# Altium PCB PCB.PcbDoc
Units mm, origin at the board's own origin, x right, y up, seen from the top; angles counter-clockwise.
Board outline 32.39 x 38.48 mm, 2 copper layers (Top Layer, Bottom Layer); 29 components, 24 nets, 116 pads, 23 vias.
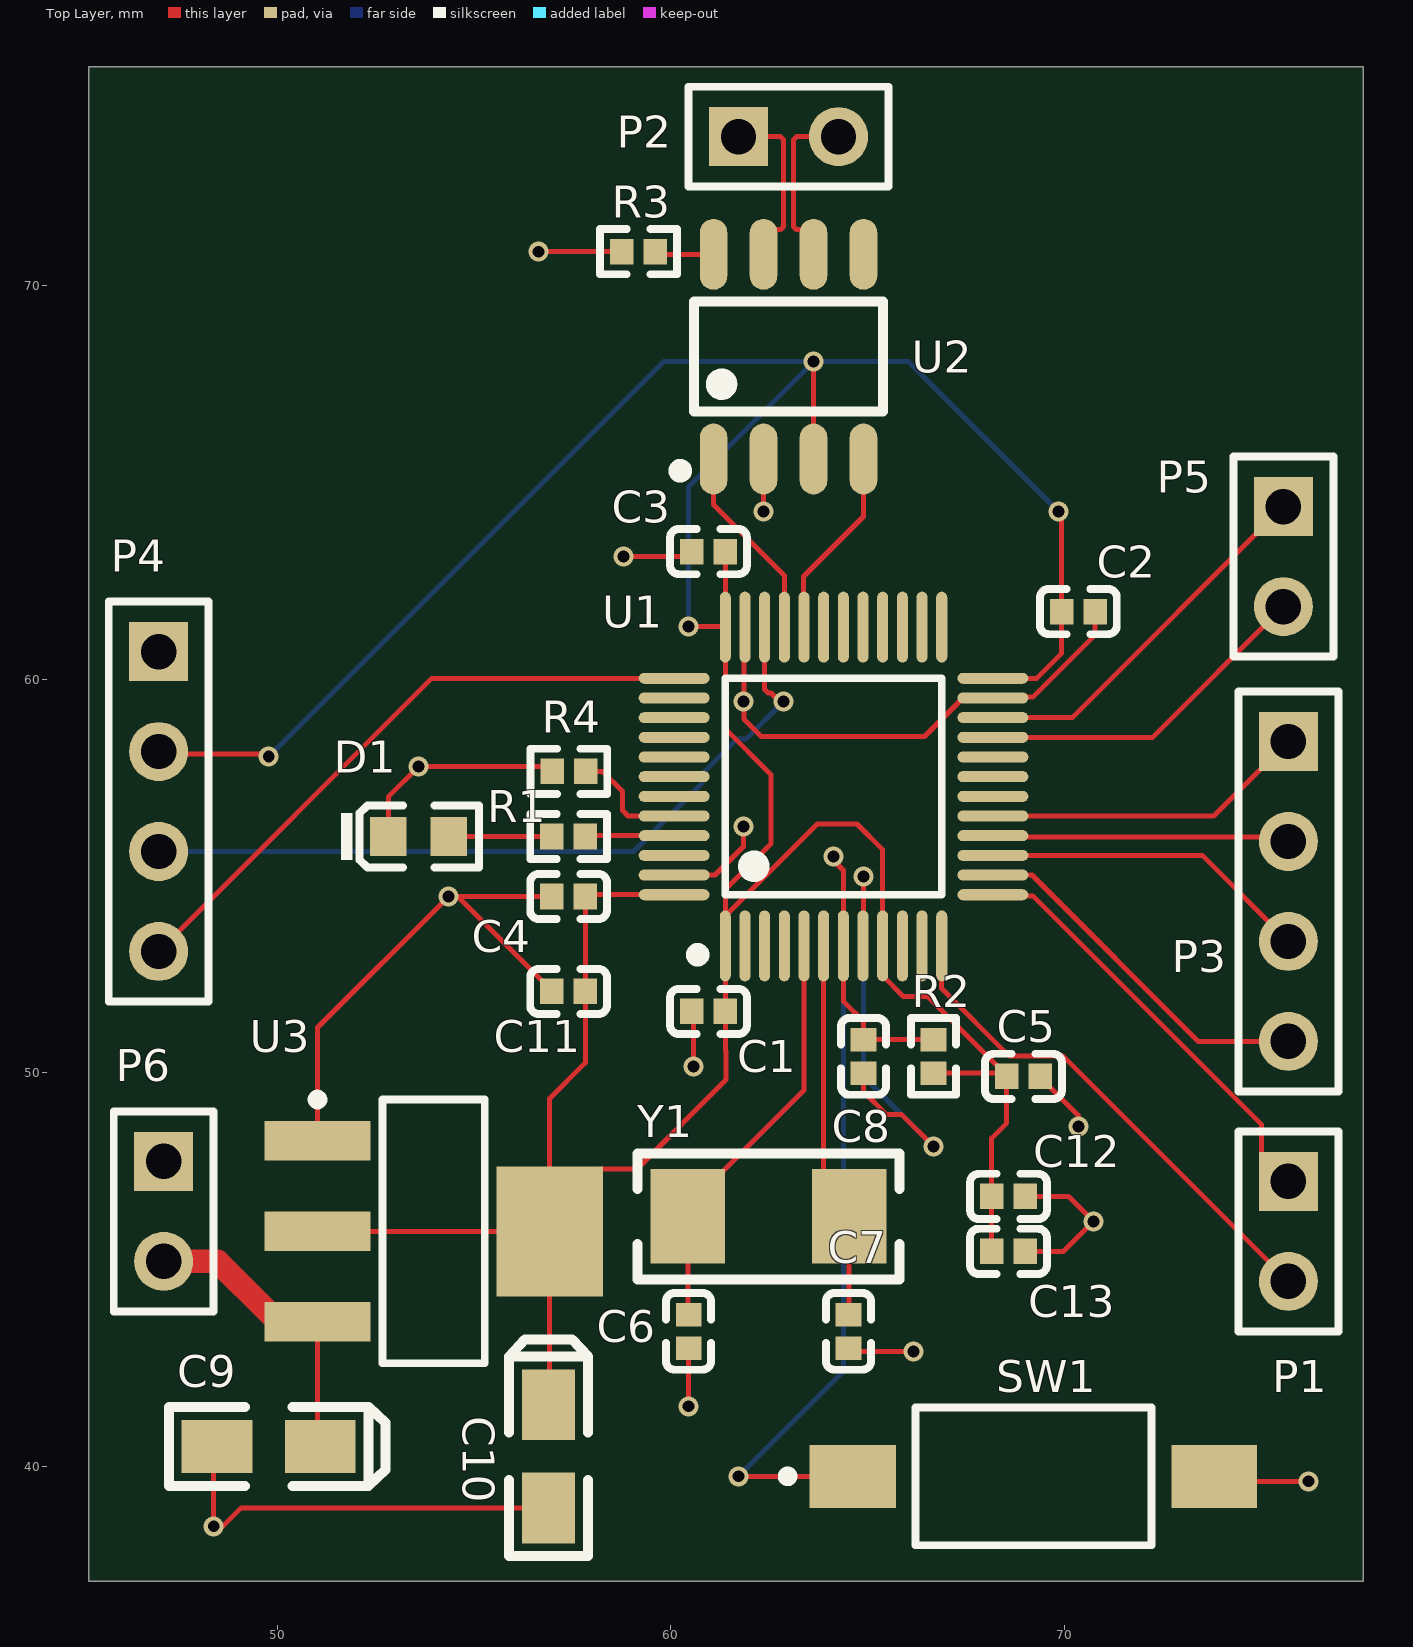
[diagram p0: Top Layer view]
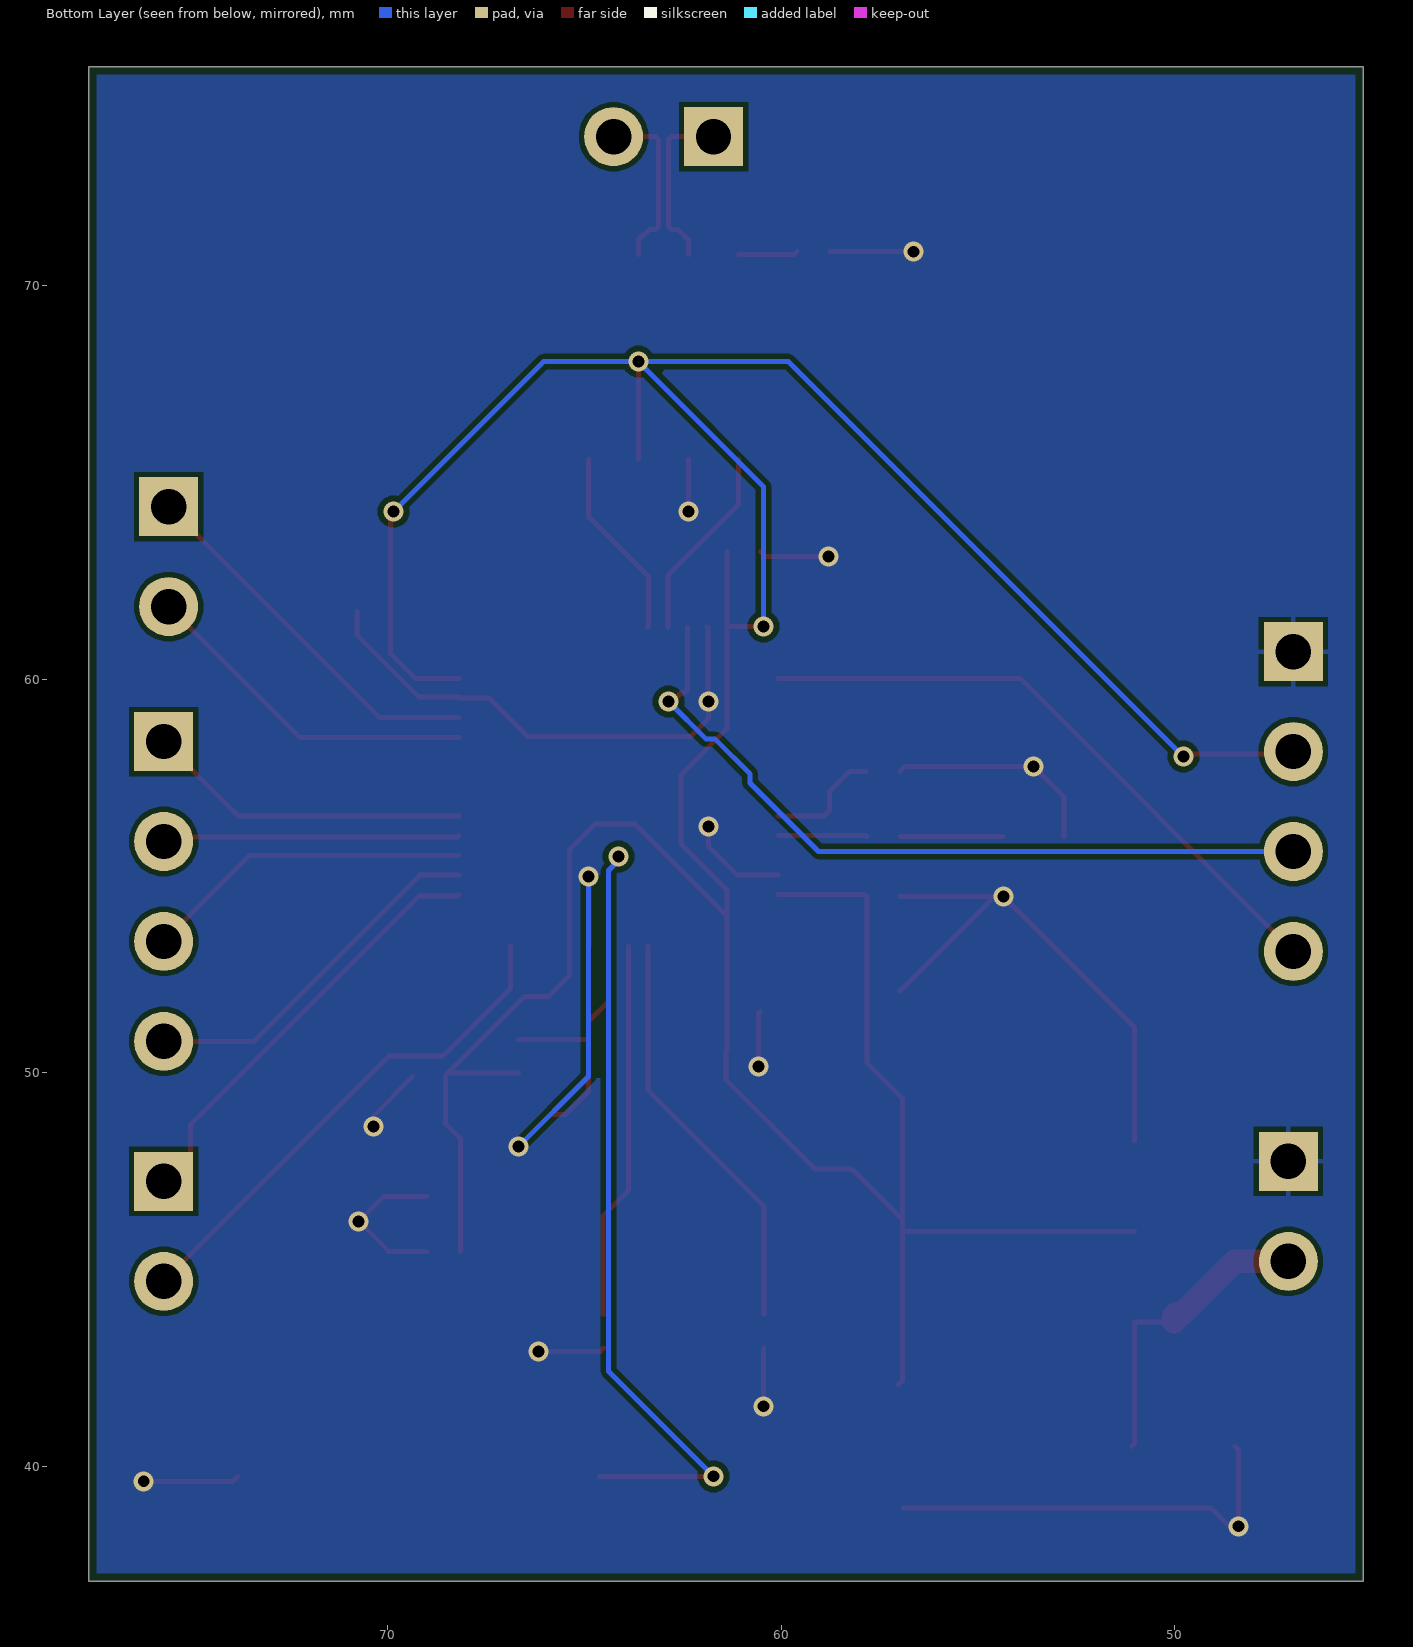
[diagram p1: Bottom Layer view, seen from below]
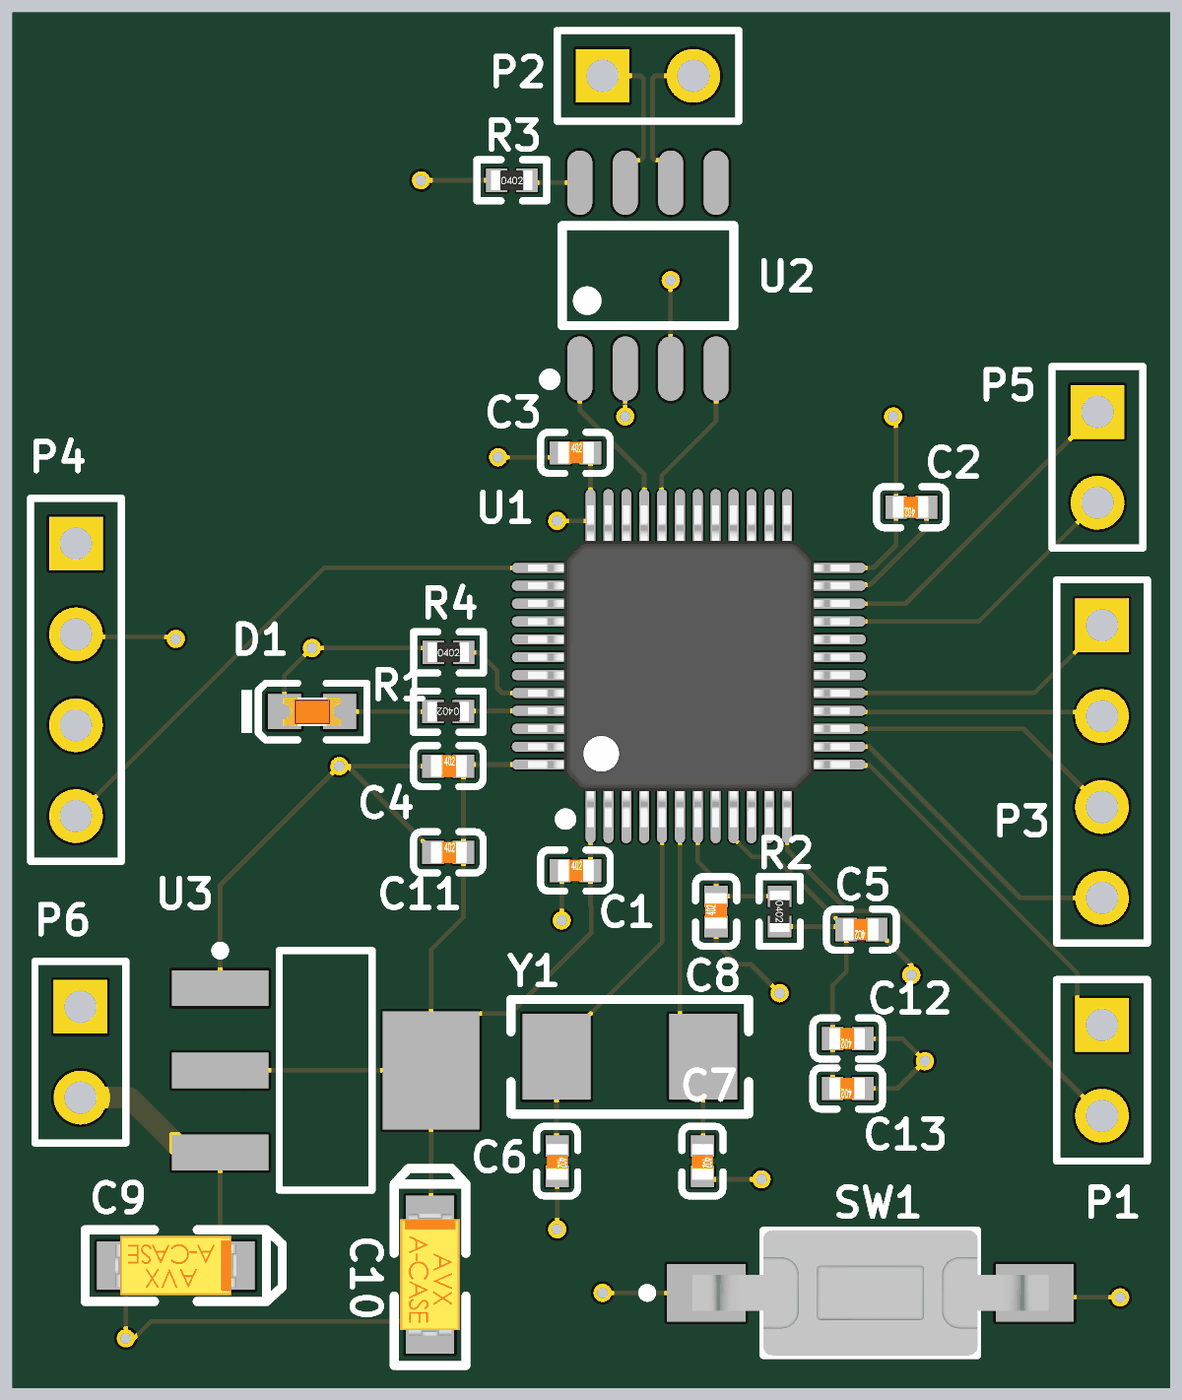
[diagram p2: 3D render of the assembled board from above, using the file's embedded part models]

## Layer stack, top to bottom
Top Solder: solder mask 0.0102, Solder Resist, Dk 3.5
Top Layer: signal copper 0.0356
Dielectric 1: dielectric 0.32, FR-4, Dk 4.8
Bottom Layer: signal copper 0.0356
Bottom Solder: solder mask 0.0102, Solder Resist, Dk 3.5

## Board outline
45.212,37.084 77.597,37.084 77.597,75.565 45.212,75.565

## Design rules (kind name [scope] priority, off if disabled: settings)
BoardOutlineClearance [All] p1: gap=0.2 ignorepadtopadclearanceinfootprint=FALSE
Clearance [All] p1: gap=0.127 ignorepadtopadclearanceinfootprint=FALSE except(0.25: Arc-Hole Track-Hole SMDPad-Hole THPad-Hole Via-Hole Fill-Hole Poly-Hole Region-Hole Text-Hole)
ComponentClearance [All] p1: gap=0.127 collisioncheckmode=3 verticalgap=0.127 showdistances=TRUE
DiffPairsRouting [All] p1: maxlimit=0.254 minlimit=0.127 mostfreqgap=0.127 toplayer_minwidth=0.127 toplayer_maxwidth=25.4 toplayer_prefwidth=0.127 bottomlayer_minwidth=0.127 bottomlayer_maxwidth=25.4 bottomlayer_prefwidth=0.127 maxuncoupledlength=12.7
Height [All] p1: minheight=0 maxheight=1816.048 prefheight=12.7
HoleSize [All] p1: absolutevalues=TRUE maxlimit=6.3 minlimit=0.3 maxpercent=80.000 minpercent=20.000
HoleToHoleClearance [All] p1: gap=0.25 allowstackedmicrovias=FALSE
MinimumAnnularRing [All] p1: minimumring=0.076
MinimumSolderMaskSliver [All] p1: minsoldermaskwidth=0
PlaneClearance [All] p1: clearance=0.127
PlaneConnect PlaneConnectPowerPads [InPadClass('PowerPads')] p1: planeconnectstyle=Direct reliefexpansion=0.508 reliefentries=4 reliefconductorwidth=0.254 reliefairgap=0.254
PlaneConnect [All] p2: pad.planeconnectstyle=Relief pad.reliefexpansion=0.3 pad.reliefentries=4 pad.reliefconductorwidth=0.127 pad.reliefairgap=0.127 via.planeconnectstyle=Direct via.reliefexpansion=0.3 via.reliefentries=4 via.reliefconductorwidth=0.127 via.reliefairgap=0.127
PolygonConnect PolygonConnectPowerPads [All vs (InPadClass('PowerPads'))] p1: connectstyle=Direct reliefconductorwidth=0.254 reliefentries=4 polygonreliefangle="90 Angle" airgapwidth=0.254
PolygonConnect [All] p2: thpad.connectstyle=Relief thpad.reliefconductorwidth=0.127 thpad.reliefentries=4 thpad.polygonreliefangle="90 Angle" thpad.airgapwidth=0.127 smdpad.connectstyle=Relief smdpad.reliefconductorwidth=0.127 smdpad.reliefentries=4 smdpad.polygonreliefangle="90 Angle" smdpad.airgapwidth=0.127 via.connectstyle=Direct via.reliefconductorwidth=0.127 via.reliefentries=4 via.polygonreliefangle="90 Angle" via.airgapwidth=0.127
RoutingVias [All] p1: holewidth=0.3 width=0.6 viastyle="Through Hole" minholewidth=0.3 minwidth=0.6 maxholewidth=0.6 maxwidth=6.6
SilkToSilkClearance [All] p1: silktosilkclearance=0
SilkToSolderMaskClearance [IsPad] p1: minsilkscreentomaskgap=0.127 clearancetoexposedcopper=TRUE
SolderMaskExpansion [All] p1: expansion=0.075 istentingtop=FALSE
Width [All] p1: maxlimit=25.4 minlimit=0.127 preferedwidth=0.127 minimp=50.000000 maximp=50.000000 favimp=50.000000
20 further rules are at their usual default settings.

## Classes and differential pairs
component class MCU: C1 C2 C3 C4 C5 C6 C7 C8 C9 C10 C11 C12 C13 D1 R1 R2 R4 SW1 U1 U3 Y1
component class Connectors: P1 P2 P3 P4 P5 P6 R3 U2
differential pair CAN: +CAN_P -CAN_N

## Components (designator, comment, footprint, x,y, rotation, side; value= is the part's Value field where it differs from the comment)
C1 "100nF" 0402_C 60.96,51.562 r0 top
C2 "100nF" 0402_C 70.358,61.722 r180 top
C3 "100nF" 0402_C 60.96,63.246 r0 top
C4 "100nF" 0402_C 57.404,54.483 r0 top
C5 "100nF" 0402_C 68.961,49.911 r180 top
C6 "30pF" 0402_C 60.452,43.434 r270 top
C7 "30pF" 0402_C 64.516,43.434 r270 top
C8 "100nF" 0402_C 64.897,50.419 r90 top
C9 "10uF" CASE-A_3216 49.784,40.513 r0 top
C10 "10uF" CASE-A_3216 56.896,40.259 r90 top
C11 "4.7uF" 0402_C 57.404,52.07 r0 top
C12 "10nF" 0402_C 68.58,46.863 r180 top
C13 "1.0uF" 0402_C 68.58,45.466 r180 top
D1 "0603 Red" 0603_LED_S1 53.594,56.007 r0 top
P1 "Header 2" HDR1X2 75.692,47.244 r270 top
P2 "Header 2" HDR1X2 61.722,73.787 r0 top
P3 "Header 4" HDR1X4 75.692,58.42 r270 top
P4 "Header 4" HDR1X4 46.99,60.706 r270 top
P5 "Header 2" HDR1X2 75.565,64.389 r270 top
P6 "Header 2" HDR1X2 47.117,47.752 r270 top
R1 "200Ω ±1%" 0402_R 57.404,56.007 r180 top
R2 "100KΩ ±1%" 0402_R 66.675,50.419 r270 top
R3 "10KΩ ±1%" 0402_R 59.182,70.866 r0 top
R4 "10KΩ ±1%" 0402_R 57.412,57.663 r0 top
SW1 "FSMSM" TECO-FSMSM-2_V 69.215,39.751 r0 top
U1 "STM32F103C8T6" LQFP-48_7x7x05P 64.135,57.277 r0 top
U2 "CAN/SN65HVD230DR" SOIC-8_150mil 62.992,68.199 r0 top
U3 "LM1117IMPX-3.3/NOPB" MP04A_M 53.975,45.974 r0 top
Y1 "8MHz ±20ppm 20pF" SMD-5032_2P 62.484,46.355 r180 top

## Footprints (in the part's own frame and the unit in brackets; to place one, negate y for a bottom-side part, rotate by r counter-clockwise, add the part's x,y. Pads: shape width x height; smd on the part's side, far side on the other; paste and mask are expansions set on the pad)
0402_C [mm]
  rect 0.6x0.65 smd mask+0.051: 1(-0.425,0) 2(0.425,0)
  silkscreen extent -0.97,-0.58 0.97,0.58, body extent -0.48,-0.3 0.52,0.3, height 0.2
0402_R [mm]
  rect 0.6x0.65 smd mask+0.051: 1(-0.425,0) 2(0.425,0)
  silkscreen extent -0.97,-0.58 0.97,0.58, body extent -0.57,-0.27 0.58,0.28, height 0.41
0603_LED_S1 [mm]
  rect 0.93x0.98 smd: A(0.77,0) K(-0.77,0)
  silkscreen extent -1.97,-0.79 1.54,0.79, body extent -0.8,-0.4 0.8,0.4, height 0.6
CASE-A_3216 [mm]
  rect 1.8x1.35 smd: 1(1.31,0) 2(-1.31,0)
  silkscreen extent -2.54,-1 2.97,1, body extent -1.7,-0.84 1.7,0.84, height 1.71
HDR1X2 [mm] "Connector; Header; 2 Position"
  rect 1.5x1.5 hole 0.9: 1(0,0)
  round 1.5 hole 0.9: 2(2.54,0)
  silkscreen extent -1.27,-1.27 3.81,1.27
HDR1X4 [mm] "Connector; Header; 4 Position"
  rect 1.5x1.5 hole 0.9: 1(0,0)
  round 1.5 hole 0.9: 2(2.54,0) 3(5.08,0) 4(7.62,0)
  silkscreen extent -1.27,-1.27 8.89,1.27
LQFP-48_7x7x05P [mm]
  oval 0.28x1.8 smd mask+0.051: 1(-2.75,-4.05) 2(-2.25,-4.05) 3(-1.75,-4.05) 4(-1.25,-4.05) 5(-0.75,-4.05) 6(-0.25,-4.05) 7(0.25,-4.05) 8(0.75,-4.05) 9(1.25,-4.05) 10(1.75,-4.05) 11(2.25,-4.05) 12(2.75,-4.05) 25(2.75,4.05) 26(2.25,4.05) 27(1.75,4.05) 28(1.25,4.05) 29(0.75,4.05) 30(0.25,4.05) 31(-0.25,4.05) 32(-0.75,4.05) 33(-1.25,4.05) 34(-1.75,4.05) 35(-2.25,4.05) 36(-2.75,4.05)
  oval 1.8x0.28 smd mask+0.051: 13(4.05,-2.75) 14(4.05,-2.25) 15(4.05,-1.75) 16(4.05,-1.25) 17(4.05,-0.75) 18(4.05,-0.25) 19(4.05,0.25) 20(4.05,0.75) 21(4.05,1.25) 22(4.05,1.75) 23(4.05,2.25) 24(4.05,2.75) 37(-4.05,2.75) 38(-4.05,2.25) 39(-4.05,1.75) 40(-4.05,1.25) 41(-4.05,0.75) 42(-4.05,0.25) 43(-4.05,-0.25) 44(-4.05,-0.75) 45(-4.05,-1.25) 46(-4.05,-1.75) 47(-4.05,-2.25) 48(-4.05,-2.75)
  silkscreen extent -3.6,-4.42 2.75,2.75, body extent -4.5,-4.5 4.5,4.5, height 1.6
MP04A_M [mm] "SOT223, 4-Leads, Body 6.5x3.5mm, Pitch 2.3mm, Lead Span 7mm, IPC Low Density"
  rect 2.7x1 smd: 1(-2.95,2.3) 2(-2.95,0) 3(-2.95,-2.3)
  rect 2.7x3.3 smd: 4(2.95,0)
  silkscreen extent -3.07,-3.35 1.3,3.47, body extent -1.86,-3.35 1.86,3.35, height 1.8
SMD-5032_2P [mm]
  rect 1.9x2.4 smd: 1(-2.05,0) 2(2.05,0)
  silkscreen extent -3.32,-1.6 3.32,1.6
SOIC-8_150mil [mm]
  oval 0.7x1.8 smd: 1(-1.905,-2.6) 2(-0.635,-2.6) 3(0.635,-2.6) 4(1.905,-2.6) 5(1.905,2.6) 6(0.635,2.6) 7(-0.635,2.6) 8(-1.905,2.6)
  silkscreen extent -2.9,-3.05 2.4,1.4
TECO-FSMSM-2_V [mm] "SMD, 2-Leads, Body 6x3.5mm, Pitch 9.19mm"
  rect 2.2x1.6 smd: 1(-4.595,0)
  rect 2.18x1.6 smd: 2(4.595,0)
  silkscreen extent -6.37,-1.75 3,1.75, body extent -4.98,-1.75 4.98,1.75, height 4.4

## Part data
C1 C2 C3 C4 C5 C8: library part "0402 100nF (104) 10% 16V", "Chip capacitors", Manufacturer="Samsung Electro-Mechanics", Package=0402, PartNumber=CL05B104KO5NNNC, SuppliersPartNumber=C1525, Tolerance=10%, Voltage=16V, Capacitance=100nF, ComponentLink1Description="Supplier link", ComponentLink1URL=http://www.szlcsc.com/product/details_1877.html, Supplier=LC
C6 C7: library part "0402 30pF (300) 5% 50V", "Chip capacitors", Manufacturer="Guangdong Fenghua Advanced Tech", Package=0402, PartNumber=0402CG300J500NT, SuppliersPartNumber=C1570, Tolerance=5%, Voltage=50V, Capacitance=30pF, ComponentLink1Description="Supplier link", ComponentLink1URL=http://www.szlcsc.com/product/details_1922.html, Supplier=LC
C9 C10: library part "3216 10uF (106) 10% 16V", "Tantalum capacitor", Manufacturer=AVX, Package=3216, PartNumber=TAJA106K016RNJ, SuppliersPartNumber=C7171, Tolerance=10%, Voltage=16V, Capacitance=10uF, ComponentLink1Description="Supplier link", ComponentLink1URL=http://www.szlcsc.com/product/details_7643.html, Supplier=LC
C11: library part "0402 4.7uF (475) 20% 10V", "Chip capacitor", Manufacturer="Samsung Electro-Mechanics", Package=0402, PartNumber=CL05A475MP5NRNC, SuppliersPartNumber=C23733, Tolerance=20%, Voltage=10V, Capacitance=4.7uF, ComponentLink1Description="Supplier link", ComponentLink1URL=http://www.szlcsc.com/product/details_24469.html, Supplier=LC
C12: library part "0402 10nF (103) 10% 50V", "Chip capacitors", Manufacturer="Samsung Electro-Mechanics", Package=0402, PartNumber=CL05B103KB5NNNC, SuppliersPartNumber=C15195, Tolerance=10%, Voltage=50V, Capacitance=10nF, ComponentLink1Description="Supplier link", ComponentLink1URL=http://www.szlcsc.com/product/details_15869.html, Supplier=LC
C13: library part "0402 1.0uF (105) 10% 25V", "Chip capacitor", Capacitance=1uF, Manufacturer="Samsung Electro-Mechanics", Package=0402, PartNumber=CL05A105KA5NQNC, SuppliersPartNumber=C52923, Tolerance=10%, Voltage=25V, ComponentLink1Description="Supplier link", ComponentLink1URL=http://www.szlcsc.com/product/details_53938.html, Supplier=LC
D1: library part "0603 LED Red", "LED", Color=Red, Package=0603, SuppliersPartNumber=C2286, ComponentLink1Description=供应商链接, ComponentLink1URL=http://www.szlcsc.com/product/details_2659.html, Supplier=LC
P1 P2 P5 P6: "Header, 2-Pin", LatestRevisionDate=17-Jul-2002, LatestRevisionNote="Re-released for DXP Platform.", Publisher="Altium Limited"
P3 P4: "Header, 4-Pin", LatestRevisionDate=17-Jul-2002, LatestRevisionNote="Re-released for DXP Platform.", Publisher="Altium Limited"
R1: library part "0402 200R (2000) 1%", "Chip resistor", Manufacturer="Uniroyal Elec", Package=0402, PartNumber=0402WGF2000TCE, Power=1/16W, Resistance=200Ω, SuppliersPartNumber=C25087, Tolerance=1%, ComponentLink1Description="Supplier link", ComponentLink1URL=http://www.szlcsc.com/product/details_25830.html, Supplier=LC
R2: library part "0402 100K (1003) 1%", "Chip resistor", Manufacturer="Uniroyal Elec", Package=0402, PartNumber=0402WGF1003TCE, Power=1/16W, Resistance=100KΩ, SuppliersPartNumber=C25741, Tolerance=1%, ComponentLink1Description="Supplier link", ComponentLink1URL=http://www.szlcsc.com/product/details_26484.html, Supplier=LC
R3 R4: library part "0402 10K (1002) 1%", "Chip resistor", Manufacturer="Uniroyal Elec", Package=0402, PartNumber=0402WGF1002TCE, Power=1/16W, Resistance=10KΩ, SuppliersPartNumber=C25744, Tolerance=1%, ComponentLink1Description="Supplier link", ComponentLink1URL=http://www.szlcsc.com/product/details_26487.html, Supplier=LC
SW1: library part CMP-2000-07511-1, "FSMSM Push Button Switch, 50 mA, -35 to 85 degC, 2-Pin SMD, RoHS, Bulk", Case\/Package=SMD/SMT, Contact Current Rating=50mA, Contact Resistance=100mOhm, Manufacturer="TE Connectivity", Max Operating Temperature=85degC, Max Voltage Rating (DC)=12V, Min Operating Temperature=-35degC, Operating Force=180gf, Package Description="2-Pin Surface Mount Device, Body 6 x 3.5 mm, Pitch 9.19 mm", Package Quantity=1000, Voltage Rating (DC)=24V, Actuator Length=1.07mm, Actuator Material=Polyamide, Contact Material=Brass, Contact Plating=Silver, Current Rating=50mA, Datasheet URL=http://www.te.com/commerce/DocumentDelivery/DDEController?Action=showdoc&DocId=Customer+Drawing%7F1437566-3%7FC2%7Fpdf%7FEnglish%7FENG_CD_1437566-3_C2_1437566_3_1_c.dwg.pdf%7F1437566-3, Datasheet Version="Rev. C2, 08/2014", Electrical Life=20000Cycles, ELV=Compliant, Illumination Type=Illuminated, Lead Free=LeadFree, Manufacturer URL=http://www.te.com/, Mechanical Life=20000Cycles, Mount=SurfaceMount, Mounting Technology=SurfaceMount, Orientation=Straight, Package Reference=FSMSM, Packaging=LoosePiece, REACH SVHC=Unknown, RoHSCompliant=true, Switch Travel=0.25mm, Termination=GullWing, Throw Configuration=SPST
U1: "ARM", Package=LQFP-48_7x7x05P, SuppliersPartNumber=C8734, ComponentLink1Description=供应商链接, ComponentLink1URL=http://www.szlcsc.com/product/details_9243.html, Supplier=LC
U2: library part CAN/SN65HVD230DR_[C12084], "CAN", Package=SOIC-8_150mil, SuppliersPartNumber=C12084, ComponentLink1Description=供应商链接, ComponentLink1URL=http://www.szlcsc.com/product/details_12661.html, Supplier=LC
U3: library part CMP-0062-01632-3, "800mA Low-Dropout Linear Regulator, 4-pin SOT-223, Pb-Free", Manufacturer="National Semiconductor", PackageTopMarking=XYTT*N05B, PowerWise=N, Code_IPC=SOT223-4, Code_JEDEC=TO-261-AA, ComponentLink1Description="Manufacturer URL", ComponentLink1URL=http://www.national.com/, ComponentLink2Description="LM1117 Datasheet", ComponentLink2URL=http://www.national.com/ds/LM/LM1117.pdf, ComponentLink3Description="LM1117 Web Page", ComponentLink3URL=http://www.national.com/pf/LM/LM1117.html, ComponentLink4Description="MP04A Package Page", ComponentLink4URL=http://www.national.com/packaging/folders/mp04a.html, CompType="LDO IC", DatasheetVersion=Apr-2006, High-Reliability=Y, PackageDescription="Molded SOT-223, 6.50 x 3.56 x 1.6mm Body, 4 Lead, 2.3mm Pitch", PackageReference=MP04A, PackageVersion="revB, Apr-2003", PartNumber=LM1117IMPX-3.3/NOPB, PinCount=4, RevisionNote="SCH symbol layout adjusted", RoHS=Y
Y1: library part "SMD-5032_2P 8MHz 20ppm 20pF", "贴片晶振", Package=SMD-5032_2P, SuppliersPartNumber=C115962, ComponentLink1Description=供应商链接, ComponentLink1URL=http://www.szlcsc.com/product/details_117214.html, Supplier=LC

## Via types
v1: diameter 0.508, hole 0.3, Top Layer to Bottom Layer, 23 vias

## Nets (pads, with @x,y where several pads share a name; then routed paths per layer and width w, separated by ;. In a path a pad name is that pad's centre, name@x,y a point inside that pad or via, vN(x,y) a via of type N, cw(c..) or ccw(c..) an arc to the next point about the centre after c; other vN are vias at no path point)
+12: C9.1 P6.2 U3.3 | length 7.8
  Top Layer w0.127: U3.3@50.024,43.674 U3.3 51.025,40.582 C9.1
  Top Layer w0.6: P6.2 48.486,45.212 49.824,43.874 49.975,43.874 50.024,43.825 U3.3@50.024,43.674
BOOT0: R4.2 U1.44 | length 3
  Top Layer w0.127: R4.2 58.263,57.663 58.777,57.149 58.777,56.666 58.916,56.527 U1.44
CAN_N: P2.2 U2.6 | length 4.4
  Top Layer w0.127: U2.6 63.627,71.161 63.362,71.426 63.193,71.426 63.119,71.5 63.119,73.713 63.193,73.787 P2.2
CAN_P: P2.1 U2.7 | length 4.4
  Top Layer w0.127: P2.1 62.791,73.787 62.865,73.713 62.865,71.5 62.791,71.426 62.622,71.426 62.357,71.161 U2.7
CAN_RX: U1.32 U2.4 | length 4.9
  Top Layer w0.127: U1.32 63.373,61.339 63.373,62.611 64.897,64.135 U2.4
CAN_TX: U1.33 U2.1 | length 5
  Top Layer w0.127: U2.1 61.087,64.438 62.885,62.64 U1.33
GND: C1.1 C2.1 C3.1 C4.1 C5.1 C6.2 C7.2 C8.1 C9.2 C10.2 C11.1 C12.1 C13.1 D1.K P4.1 P6.1 R3.1 R4.1 SW1.2 U1.8 U1.23 U1.35 U1.47 U2.2 U3.1 | length 76.5
  Top Layer w0.127: P6.1 P6.1@47.639,48.274 ; C9.2 48.387,40.426 v1(48.387,38.481) 48.618,38.481 49.086,38.949 C10.2 ; U3.1 51.025,51.152 v1(54.356,54.483) v1@54.591,54.483 ; D1.K 52.824,57.015 v1(53.594,57.785) 56.864,57.785 R4.1 ; v1(56.642,70.866) R3.1 ; C11.1 56.979,52.095 v1@54.591,54.483 ; C4.1 v1@54.591,54.483 ; v1(58.801,63.119) 60.408,63.119 C3.1 ; U1.47 61.123,55.027 61.849,55.753 v1(61.849,56.261) ; v1(60.452,41.529) C6.2 ; C1.1 60.579,51.518 v1(60.579,50.165) ; U1.35 61.867,61.309 61.867,59.454 v1(61.849,59.436) 61.855,59.43 61.855,58.991 62.3,58.547 66.445,58.547 67.425,59.527 U1.23 68.214,59.556 69.208,59.556 70.783,61.131 C2.1 ; v1(62.357,64.262) U2.2 ; C7.2 64.599,42.926 v1(66.167,42.926) ; U1.8 64.891,53.233 64.891,54.985 v1(64.897,54.991) ; C8.1 64.897,49.53 65.486,48.941 65.867,48.941 v1(66.675,48.133) ; C13.1 69.977,45.466 v1(70.739,46.228) 70.104,46.863 C12.1 ; C5.1 69.386,49.886 70.358,48.914 v1(70.358,48.641) ; SW1.2 73.937,39.624 v1(76.2,39.624)
  Bottom Layer w0.127: v1(64.897,54.991) 64.897,49.911 v1(66.675,48.133)
I2C_SCL: P5.2 U1.21 | length 8.8
  Top Layer w0.127: U1.21 72.243,58.527 P5.2
I2C_SDA: P5.1 U1.22 | length 9.6
  Top Layer w0.127: U1.22 70.203,59.027 P5.1
NetD1_A: D1.A R1.2 | length 2.6
  Top Layer w0.127: D1.A R1.2
NetR1_1: R1.1 U1.45 | length 2.3
  Top Layer w0.127: R1.1 57.849,56.027 U1.45
NetR3_2: R3.2 U2.8 | length 1.5
  Top Layer w0.127: R3.2 59.674,70.799 U2.8
OSC_IN: C6.1 U1.5 Y1.2 | length 10.6
  Top Layer w0.127: C6.1 60.434,43.877 Y1.2 60.434,46.605 63.385,49.556 U1.5
OSC_OUT: C7.1 U1.6 Y1.1 | length 9.6
  Top Layer w0.127: U1.6 63.885,47.004 Y1.1 64.534,43.877 C7.1
RST: C8.2 R2.1 SW1.1 U1.7 | length 26.6
  Top Layer w0.127: v1(61.722,39.751) SW1.1 ; v1(64.135,55.499) 64.135,55.396 64.387,55.144 64.387,53.229 U1.7 64.385,51.82 64.897,51.308 C8.2 R2.1
  Bottom Layer w0.127: v1(61.722,39.751) 64.389,42.418 64.389,55.142 64.135,55.396 v1(64.135,55.499)
SPI_CLK: P3.3 U1.15 | length 8.4
  Top Layer w0.127: U1.15 73.505,55.527 P3.3
SPI_CS: P3.4 U1.14 | length 9.3
  Top Layer w0.127: U1.14 69.179,55.027 73.406,50.8 P3.4
SPI_MISO: P3.2 U1.16 | length 7.6
  Top Layer w0.127: U1.16 68.214,55.998 75.574,55.998 P3.2
SPI_MOSI: P3.1 U1.17 | length 8.3
  Top Layer w0.127: U1.17 73.799,56.527 P3.1
SWDCLK: P4.4 U1.37 | length 16
  Top Layer w0.127: P4.4 53.931,60.027 U1.37
SWDIO: P4.3 U1.34 | length 19.8
  Top Layer w0.127: U1.34 62.385,59.741 62.475,59.651 62.547,59.651 62.762,59.436 v1(62.865,59.436)
  Bottom Layer w0.127: P4.3 59.055,55.626 60.797,57.368 60.797,57.598 61.679,58.48 61.909,58.48 v1(62.865,59.436)
UART_RX: P1.1 U1.13 | length 11
  Top Layer w0.127: U1.13 68.214,54.498 69.2,54.498 75.005,48.693 75.005,47.931 P1.1
UART_TX: P1.2 U1.12 | length 13
  Top Layer w0.127: U1.12 66.885,52.144 68.603,50.426 69.97,50.426 P1.2
VCC3V3: C1.2 C2.2 C3.2 C4.2 C5.2 C10.1 C11.2 C12.2 C13.2 P4.2 R2.2 U1.1 U1.9 U1.24 U1.36 U1.48 U2.3 U3.2 U3.4 | length 106.1
  Top Layer w0.127: P4.2 47.053,58.102 49.721,58.102 v1(49.784,58.039) ; U3.2 U3.4 ; C10.1@57.023,42.077 56.925,42.175 U3.4 ; U1.48 57.873,54.527 C4.2 C11.2 57.829,50.255 56.925,49.351 U3.4@56.925,46.274 ; v1(60.452,61.341) 61.371,61.341 U1.36 ; C3.2 U1.36 ; U2.3 v1(63.627,68.072) ; R2.2 C5.2@68.453,49.994 ; C13.2 C12.2 68.155,48.343 68.536,48.724 C5.2 68.536,49.936 66.529,51.943 65.909,51.943 65.385,52.467 U1.9 65.385,55.67 64.731,56.325 63.723,56.325 U1.1@61.385,53.987 ; U1.24 69.298,60.027 69.933,60.662 C2.2 69.933,64.179 v1(69.85,64.262) ; U3.4 U3.4@56.925,46.274 ; U3.4@56.925,46.274 58.212,47.561 59.142,47.561 61.404,49.823 61.404,50.552 61.385,50.572 C1.2 U1.1 U1.1@61.385,53.987 ; U1.1@61.385,53.987 61.385,54.66 62.547,55.823 62.547,57.578 61.385,58.741 U1.36
  Bottom Layer w0.127: v1(49.784,58.039) 59.817,68.072 v1(63.627,68.072) ; v1(60.452,61.341) 60.452,64.897 v1(63.627,68.072) ; v1(69.85,64.262) 66.04,68.072 v1(63.627,68.072)
pads on no net: U1.2 U1.3 U1.4 U1.10 U1.11 U1.18 U1.19 U1.20 U1.25 U1.26 U1.27 U1.28 U1.29 U1.30 U1.31 U1.38 U1.39 U1.40 U1.41 U1.42 U1.43 U1.46 U2.5

## Polygon pours and split planes (outlines as drawn)
GND on Bottom Layer "GND_L02_P000" (solid, remove dead copper, pour order 0): 43.815,76.327 44.323,75.819 78.232,75.819 78.232,36.957 77.597,36.322 44.45,36.322